# Altium PCB main.PcbDoc
Units mm, origin at the board's own origin, x right, y up, seen from the top; angles counter-clockwise.
Board outline 138 x 23 mm, 4 copper layers (Top copper, Inner copper 1, Inner copper 2, Bottom copper), stack 1.618 mm thick; 6 components, 13 nets, 65 pads, 252 vias.
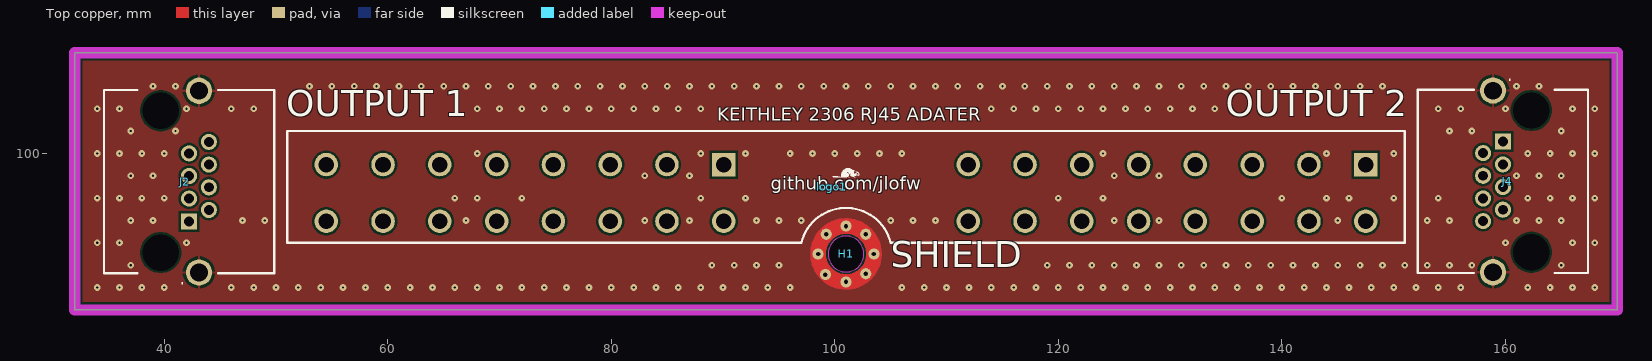
[diagram p0: Top copper view]
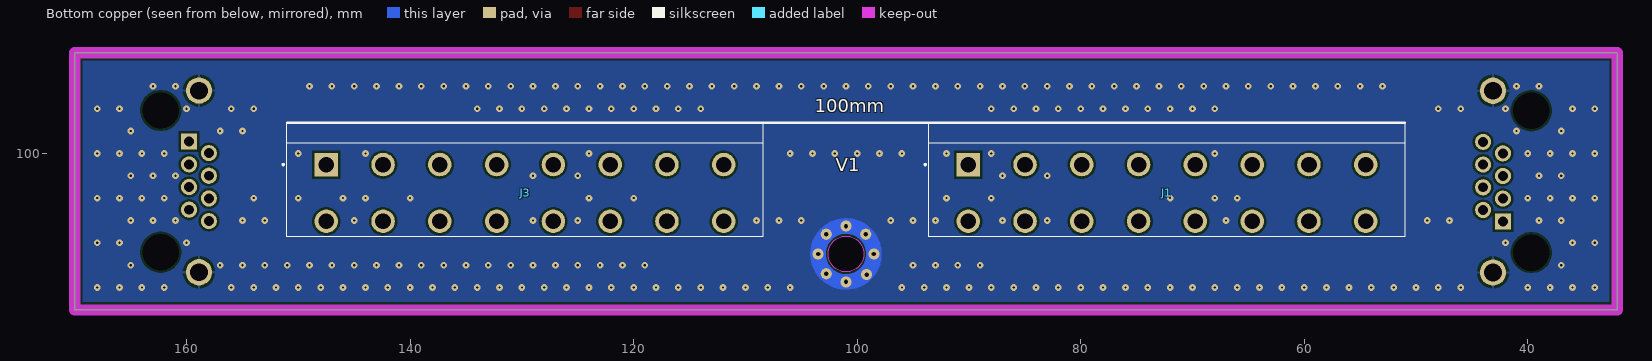
[diagram p1: Bottom copper view, seen from below]
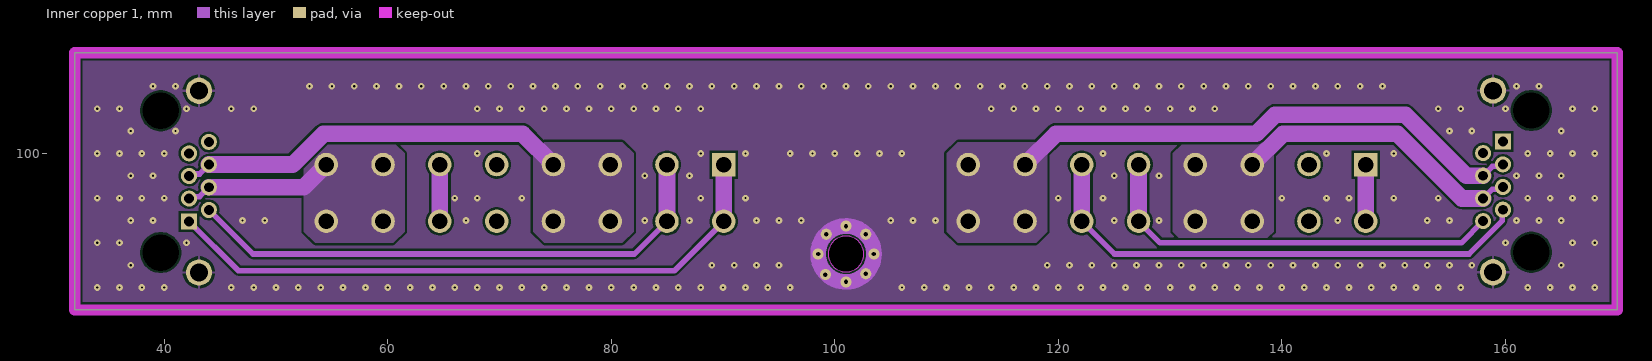
[diagram p2: Inner copper 1]
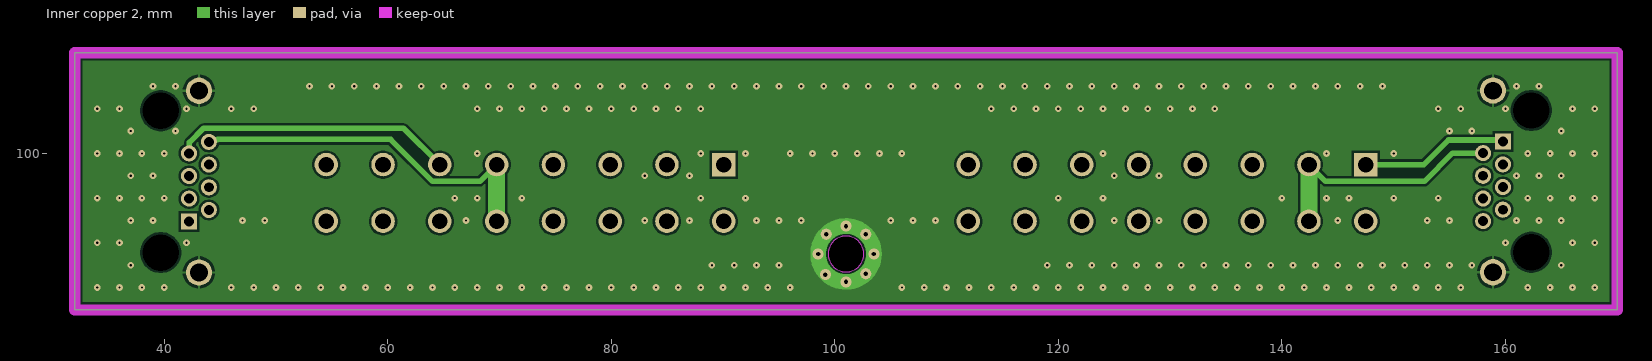
[diagram p3: Inner copper 2]

## Layer stack, top to bottom
Top Solder: solder mask 0.0102, Solder Resist, Dk 3.5
Top copper: signal copper 0.018
Dielectric 4: prepreg 0.078, PP-006, Dk 3.9
Dielectric 2: prepreg 0.078, PP-006, Dk 3.9
Inner copper 1: signal copper 0.035
Dielectric 1: dielectric 1.2, FR-4, Dk 4.4
Inner copper 2: signal copper 0.035
Dielectric 3: prepreg 0.078, PP-006, Dk 3.9
Dielectric 5: prepreg 0.078, PP-006, Dk 3.9
Bottom copper: signal copper 0.018
Bottom Solder: solder mask 0.0102, Solder Resist, Dk 3.5

## Board outline
32,86 32,109 170,109 170,86

## Design rules (kind name [scope] priority, off if disabled: settings)
BoardOutlineClearance [All] p1: gap=0.254 ignorepadtopadclearanceinfootprint=FALSE except(0: Arc-SplitContinuation Track-SplitContinuation SMDPad-SplitContinuation THPad-SplitContinuation Via-SplitContinuation Fill-SplitContinuation Poly-SplitContinuation Region-SplitContinuation Text-SplitContinuation)
Clearance [All] p1: gap=0.2 ignorepadtopadclearanceinfootprint=TRUE except(0.1: Arc-Arc)
DiffPairsRouting [All] p1: maxlimit=0.254 minlimit=0.254 mostfreqgap=0.254 toplayer_minwidth=0.2 toplayer_maxwidth=0.381 toplayer_prefwidth=0.381 midlayer1_minwidth=0.2 midlayer1_maxwidth=0.381 midlayer1_prefwidth=0.381 midlayer2_minwidth=0.2 midlayer2_maxwidth=0.381 midlayer2_prefwidth=0.381 bottomlayer_minwidth=0.2 bottomlayer_maxwidth=0.381 bottomlayer_prefwidth=0.381 maxuncoupledlength=12.7
Height [All] p1: minheight=0 maxheight=1000 prefheight=12.7
HoleSize [All] p1: absolutevalues=TRUE maxlimit=4 minlimit=0.2 maxpercent=80.000 minpercent=20.000
NetsToIgnore [InNet('GND')] p1:
PolygonConnect PowerPolygonConnect [InNetClass('PowerNet')] p1: connectstyle=Direct reliefconductorwidth=0.254 reliefentries=4 polygonreliefangle="90 Angle" airgapwidth=0.254
PolygonConnect [All] p2: thpad.connectstyle=Relief thpad.reliefconductorwidth=0.254 thpad.reliefentries=4 thpad.polygonreliefangle="90 Angle" thpad.airgapwidth=0.254 smdpad.connectstyle=Relief smdpad.reliefconductorwidth=0.254 smdpad.reliefentries=4 smdpad.polygonreliefangle="90 Angle" smdpad.airgapwidth=0.254 via.connectstyle=Direct via.reliefconductorwidth=0.254 via.reliefentries=4 via.polygonreliefangle="90 Angle" via.airgapwidth=0.254
RoutingVias [All] p1: holewidth=0.2 width=0.6 viastyle="Through Hole" minholewidth=0.2 minwidth=0.6 maxholewidth=3 maxwidth=3.6 useviatemplates=TRUE viatemplateguid#1={D4F505F2-A857-46C3-9D29-15A025EA9B51} viatemplatename#1=v60h20
SolderMaskExpansion [All] p1: expansion=0.102 istentingtop=FALSE
UnRoutedNet [All] p1: checkbadconnections=TRUE
Width [All] p1: maxlimit=1.5 minlimit=0.2 preferedwidth=0.5
26 further rules are at their usual default settings.

## Classes and differential pairs
net class PowerNet: 1_DVM_N 1_DVM_P 1_SENSE_N 1_SENSE_P 1_SOURCE_N 1_SOURCE_P 2_DVM_N 2_DVM_P 2_SENSE_N 2_SENSE_P 2_SOURCE_N 2_SOURCE_P

## Components (designator, comment, footprint, x,y, rotation, side; value= is the part's Value field where it differs from the comment)
H1 "Plated M3" MountingHole_3.2mm_M3_Pad_Via_Unplated 101,91 r0 top
J1 "phoenix_1943593" phoenix_1943593 90.06,99 r180 bottom
J2 "amphenol_RJHSE5E80" amphenol_RJHSE5E80 42.22,93.92 r270 top
J3 "phoenix_1943593" phoenix_1943593 147.5,99 r180 bottom
J4 "amphenol_RJHSE5E80" amphenol_RJHSE5E80 159.78,101.05 r90 top
logo1 "beaver" beaver 99.73,97 r0 top

## Footprints (in the part's own frame and the unit in brackets; to place one, negate y for a bottom-side part, rotate by r counter-clockwise, add the part's x,y. Pads: shape width x height; smd on the part's side, far side on the other; paste and mask are expansions set on the pad)
amphenol_RJHSE5E80 [mm]
  rect 1.446x1.446 hole 0.89: 1(0,0)
  round 1.446 hole 0.89: 2(-1.02,1.78) 3(-2.03,0) 4(-3.05,1.78) 5(-4.06,0) 6(-5.08,1.78) 7(-6.09,0) 8(-7.11,1.78)
  round 2.355 hole 1.57: MH1(4.575,0.89) MH2(-11.685,0.89)
  round 1.625 hole 3.25 unplated: MH3(2.795,-2.54) MH4(-9.905,-2.54)
  silkscreen extent -11.76,-7.62 5.6,7.62, body extent -11.97,-7.93 4.86,7.82, height 13.39
beaver [mm]
  silkscreen extent 0.08,0.85 2.46,1.69
MountingHole_3.2mm_M3_Pad_Via_Unplated [mm] "Unplated M3 mounting hole with pad and vias"
  round 1 hole 0.4: 1(-2.5,0) 1(-1.838,-1.838) 1(-1.768,1.768) 1(0,-2.5) 1(0,2.5) 1(1.768,-1.768) 1(1.768,1.768) 1(2.5,0)
  round 3.2 hole 3.2 unplated mask+1.6: ""(0,0)
  Keep-Out Layer circle w0.1: c0,0 r1.6
  Multi-Layer lines w1.4: 2.5,0 ccw(c0,0) 2.5,0
phoenix_1943593 [mm]
  rect 2.1x2.1 hole 1.4: 1(0,0)
  round 2.1 hole 1.4: 2(0,-5.08) 3(5.08,0) 4(5.08,-5.08) 5(10.16,0) 6(10.16,-5.08) 7(15.24,0) 8(15.24,-5.08) 9(20.32,0) 10(20.32,-5.08) 11(25.4,0) 12(25.4,-5.08) 13(30.48,0) 14(30.48,-5.08) 15(35.56,0) 16(35.56,-5.08)
  silkscreen extent -3.9,-6.44 39.1,3.76, body extent -3.54,-6.44 39.1,3.76, height 18.9

## Part data
H1: library part 2, Internal Number=2
J1 J3: library part 110008, "Block Header Female  5.08mm Vertical TH", Manufacturer="Phoenix Contact", Manufacturer P/N=1943593, Internal Number=110008
J2 J4: library part 110034, "RJ45 90° Angle Right Shielded", Manufacturer="Amphenol ICC", Manufacturer P/N=RJHSE5E80, Internal Number=110034
logo1: library part 1, Internal Number=1

## Via types
v1: diameter 0.6, hole 0.2, Top copper to Bottom copper, 252 vias

## Nets (pads, with @x,y where several pads share a name; then routed paths per layer and width w, separated by ;. In a path a pad name is that pad's centre, name@x,y a point inside that pad or via, vN(x,y) a via of type N, cw(c..) or ccw(c..) an arc to the next point about the centre after c; other vN are vias at no path point)
1_DVM_N: J1.3 J1.4 J2.2 | length 48.9
  Inner copper 1 w0.5: J2.2 47.94,91 82.06,91 J1.4
  Inner copper 1 w1.5: J1.4 J1.3
1_DVM_P: J1.1 J1.2 J2.1 | length 56.6
  Inner copper 1 w0.5: J2.1 46.64,89.5 85.64,89.5 J1.2
  Inner copper 1 w1.5: J1.2 J1.1
1_SENSE_N: J1.9 J1.10 J2.8 | length 33.1
  Inner copper 2 w0.5: J2.8 44.181,101.211 44.727,101.211 44.766,101.25 60.25,101.25 64,97.5 68.24,97.5 J1.9
  Inner copper 2 w1.5: J1.10 J1.9
1_SENSE_P: J1.11 J1.12 J2.7 | length 30.3
  Inner copper 1 w1.5: J1.12 J1.11
  Inner copper 2 w0.5: J2.7 42.256,100.046 42.256,100.983 43.523,102.25 61.41,102.25 J1.11
1_SOURCE_N: J1.5 J1.6 J1.7 J1.8 J2.5 J2.6 | length 35.3
  Inner copper 1 w0.5: J2.5 42.401,98.161 43.161,98.161 J2.6
  Inner copper 1 w1.5: J2.6 51.5,99 54.25,101.75 72.07,101.75 J1.7
1_SOURCE_P: J1.13 J1.14 J1.15 J1.16 J2.3 J2.4 | length 13.5
  Inner copper 1 w0.5: J2.3 42.401,96.131 43.161,96.131 J2.4
  Inner copper 1 w1.5: J2.4 52.47,96.97 J1.15
2_DVM_N: J3.3 J3.4 J4.2 | length 22.3
  Inner copper 2 w0.5: J3.3 143.92,97.5 152.75,97.5 155.28,100.03 J4.2
  Inner copper 2 w1.5: J3.4 J3.3
2_DVM_P: J3.1 J3.2 J4.1 | length 18.3
  Inner copper 1 w1.5: J3.2 J3.1
  Inner copper 2 w0.5: J3.1 152.702,99 154.905,101.203 159.627,101.203 J4.1
2_SENSE_N: J3.9 J3.10 J4.8 | length 37.5
  Inner copper 1 w0.5: J3.10 129.1,92 156.06,92 J4.8
  Inner copper 1 w1.5: J3.10 J3.9
2_SENSE_P: J3.11 J3.12 J4.7 | length 46.2
  Inner copper 1 w0.5: J3.12 125.02,91 156.75,91 159.706,93.956 159.706,94.886 J4.7
  Inner copper 1 w1.5: J3.12 J3.11
2_SOURCE_N: J3.5 J3.6 J3.7 J3.8 J4.5 J4.6 | length 26.4
  Inner copper 1 w0.5: J4.6 158.839,96.809 159.599,96.809 J4.5
  Inner copper 1 w1.5: J3.5 140.09,101.75 150.346,101.75 156.126,95.97 J4.6
2_SOURCE_P: J3.13 J3.14 J3.15 J3.16 J4.3 J4.4 | length 47.3
  Inner copper 1 w0.5: J4.4 158.839,98.839 159.599,98.839 J4.3
  Inner copper 1 w1.5: J3.13 119.77,101.75 137.686,101.75 139.386,103.45 151.05,103.45 156.5,98 J4.4
SHIELD: H1.1 J2.MH1 J2.MH2 J4.MH1 J4.MH2
  other v1: 34,88 36,88 38,88 40,88 46,88 48,88 50,88 52,88 54,88 56,88 58,88 60,88 62,88 64,88 66,88 68,88 70,88 72,88 74,88 76,88 78,88 80,88 82,88 84,88 86,88 88,88 90,88 92,88 94,88 96,88 106,88 108,88 110,88 112,88 114,88 116,88 118,88 120,88 122,88 124,88 126,88 128,88 130,88 132,88 134,88 136,88 138,88 140,88 142,88 144,88 146,88 148,88 150,88 152,88 154,88 156,88 162,88 164,88 166,88 168,88 37,90 89,90 91,90 93,90 95,90 119,90 121,90 123,90 125,90 127,90 129,90 131,90 133,90 135,90 137,90 139,90 141,90 143,90 145,90 147,90 149,90 151,90 153,90 155,90 157,90 165,90 34,92 36,92 42,92 160,92 166,92 168,92 37,94 39,94 47,94 49,94 67,94 83,94 87,94 93,94 95,94 97,94 105,94 107,94 109,94 125,94 129,94 145,94 153,94 155,94 161,94 163,94 165,94 34,96 36,96 38,96 40,96 66,96 68,96 72,96 88,96 92,96 120,96 124,96 140,96 144,96 146,96 150,96 154,96 162,96 164,96 166,96 168,96 37,98 39,98 83,98 87,98 125,98 129,98 161,98 163,98 165,98 34,100 36,100 38,100 40,100 68,100 88,100 92,100 96,100 98,100 100,100 102,100 104,100 106,100 124,100 144,100 150,100 162,100 164,100 166,100 168,100 37,102 41,102 155,102 157,102 165,102 34,104 36,104 42,104 46,104 48,104 68,104 70,104 72,104 74,104 76,104 78,104 80,104 82,104 84,104 86,104 88,104 114,104 116,104 118,104 120,104 122,104 124,104 126,104 128,104 130,104 132,104 134,104 154,104 156,104 160,104 166,104 168,104 39,106 41,106 53,106 55,106 57,106 59,106 61,106 63,106 65,106 67,106 69,106 71,106 73,106 75,106 77,106 79,106 81,106 83,106 85,106 87,106 89,106 91,106 93,106 95,106 97,106 99,106 101,106 103,106 105,106 107,106 109,106 111,106 113,106 115,106 117,106 119,106 121,106 123,106 125,106 127,106 129,106 131,106 133,106 135,106 137,106 139,106 141,106 143,106 145,106 147,106 149,106 161,106 163,106
pads on no net: H1. J2.MH3 J2.MH4 J4.MH3 J4.MH4

## Polygon pours and split planes (outlines as drawn)
SHIELD on Top copper "SHIELD_POLY_TOP" (solid, remove dead copper, pour order 13): 32,86 32,109 170,109 170,86
1_SOURCE_P on Inner copper 1 "1_SOURCE_P_L02_P009" (solid, remove dead copper, pour order 9): 52.5,100 53.5,101 60.5,101 61.5,100 61.5,93 60.5,92 53.5,92 52.5,93
1_SOURCE_N on Inner copper 1 "1_SOURCE_N_L02_P008" (solid, remove dead copper, pour order 8): 73,100 74,101 81,101 82,100 82,93 81,92 74,92 73,93
2_SOURCE_P on Inner copper 1 "2_SOURCE_P_L02_P007" (solid, remove dead copper, pour order 7): 110,100 111,101 118,101 119,100 119,93 118,92 111,92 110,93
2_SOURCE_N on Inner copper 1 "2_SOURCE_N_L02_P006" (solid, remove dead copper, pour order 6): 130.25,100 131.25,101 138.25,101 139.25,100 139.25,93 138.25,92 131.25,92 130.25,93
SHIELD on Inner copper 1 "SHIELD_POLY_I1" (solid, remove dead copper, pour order 11): 32,86 32,109 170,109 170,86
SHIELD on Inner copper 2 "SHIELD_POLY_I2" (solid, remove dead copper, pour order 12): 32,86 32,109 170,109 170,86
SHIELD on Bottom copper "SHIELD_POLY_BOTTOM" (solid, remove dead copper, pour order 10): 32,86 32,109 170,109 170,86

## Keep-outs
Keep-Out Layer:
  the board outline again, w1

## Silkscreen, mask and mechanical layers (free items; w line width, h text height)
Top Overlay:
  lines w0.2: 51,92 51,102 151,102 151,92 105,92 ccw(c101,91) 97,92 51,92
  text "OUTPUT 1" at 50.9,102.55 h4
  text "OUTPUT 2" at 134.97,102.55 h4
  text "KEITHLEY 2306 RJ45 ADATER" at 89.463,102.525 h2
  text "github.com/jlofw" at 94.266,96.325 h2
  text "SHIELD" at 105,89.05 h4
Bottom Overlay:
  lines w0.2: 51,102.75 151,102.75
  text "100mm" at 103.781,103.275 h2
  text "V1" at 101.919,98 h2
Mechanical 1:
  the board outline again, w0.5